# Altium PCB intelGalileoIdcAdapter.PcbDoc
Units mil, origin at the board's own origin, x right, y up, seen from the top; angles counter-clockwise.
Board outline 2737.5 x 2834 mil, 2 copper layers (Top Layer, Bottom Layer), stack 65.792 mil thick; 26 components, 44 nets, 119 pads, 0 vias.
Unrouted connection lines stored in the file: 1.
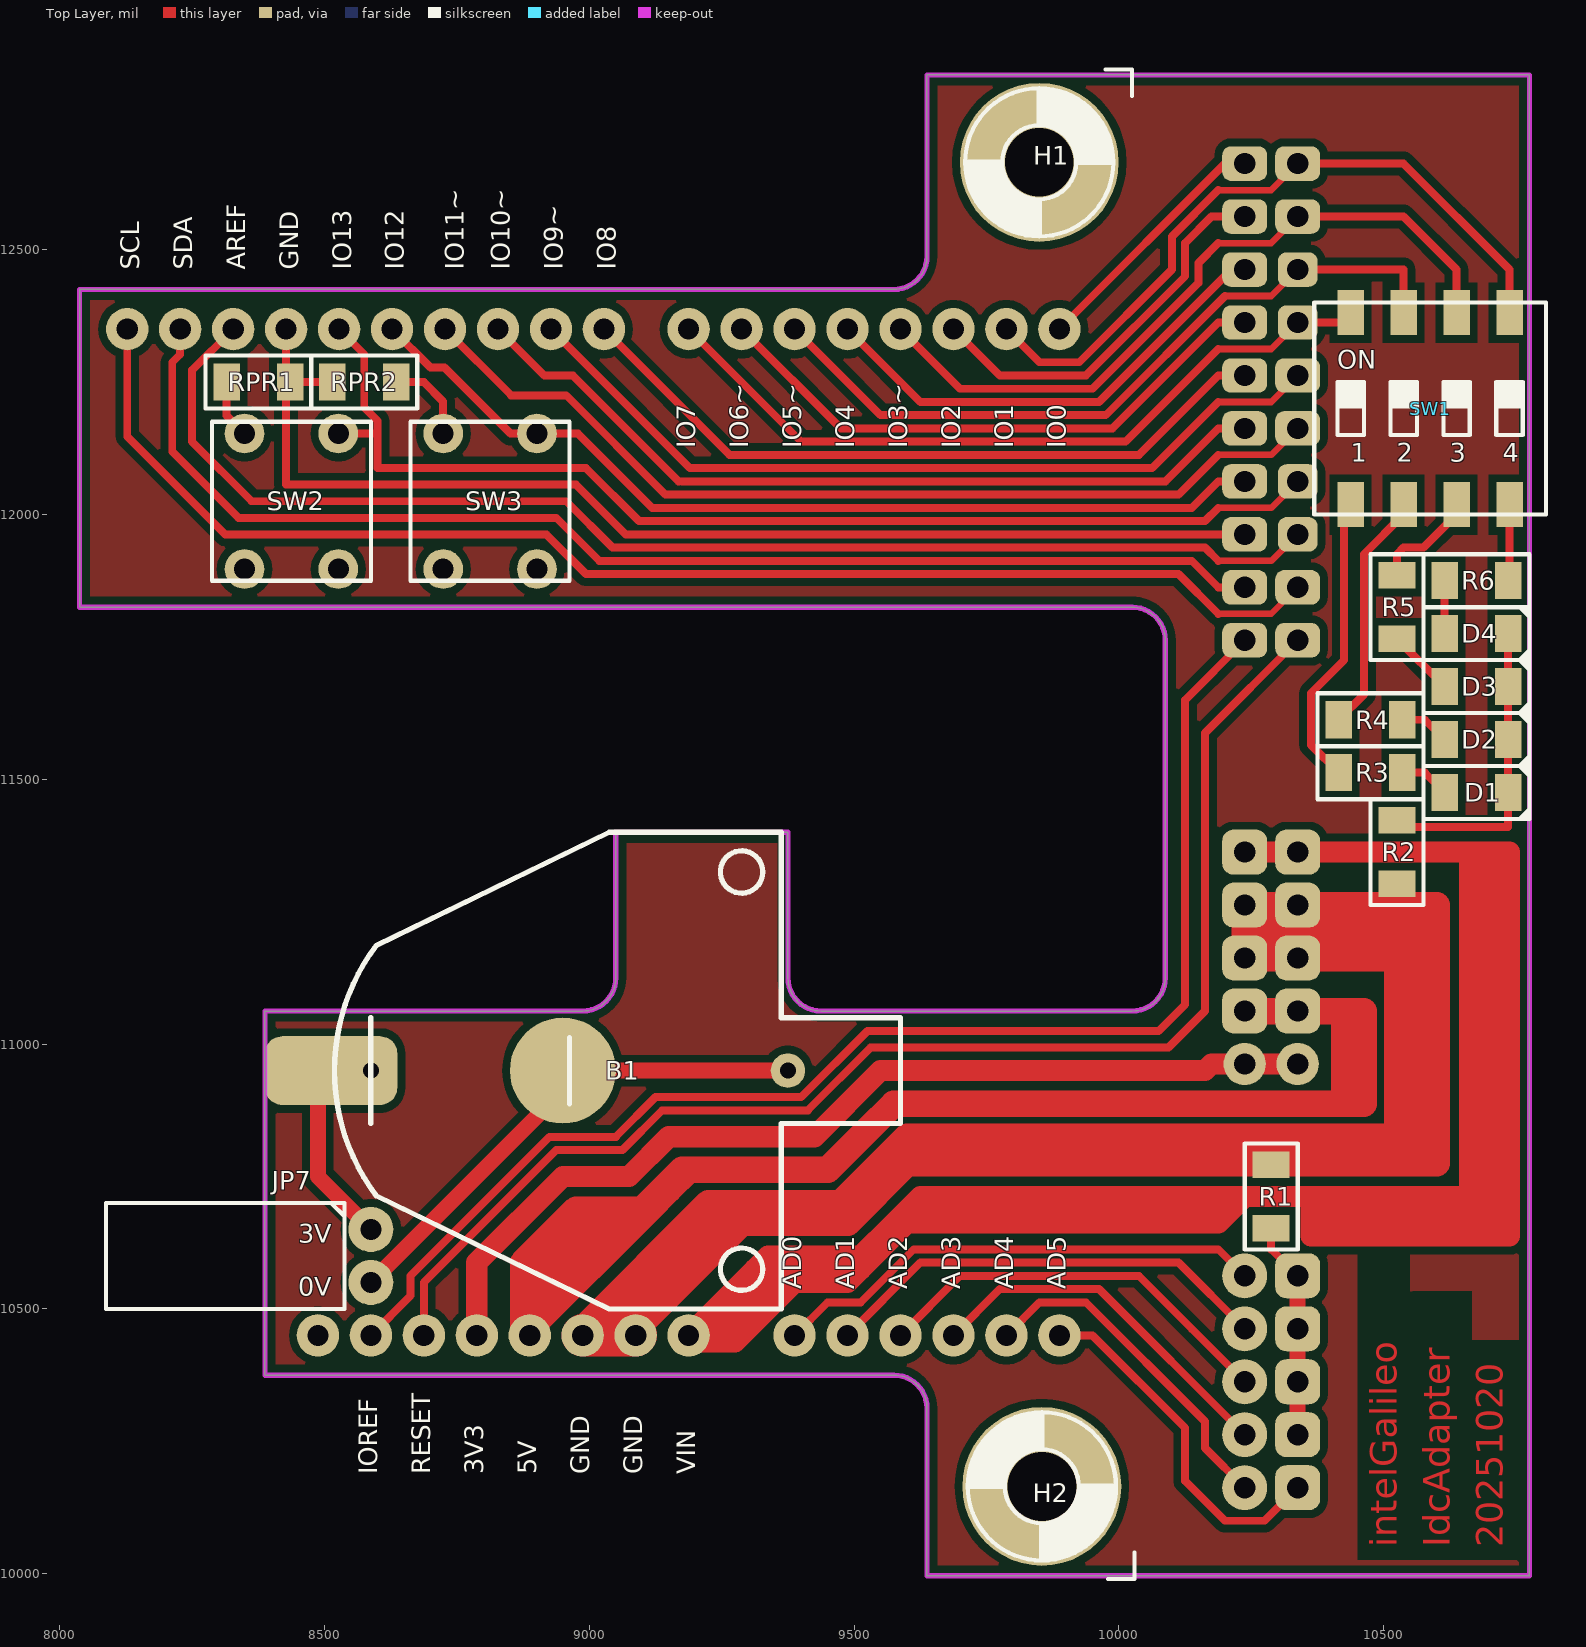
[diagram p0: Top Layer view]
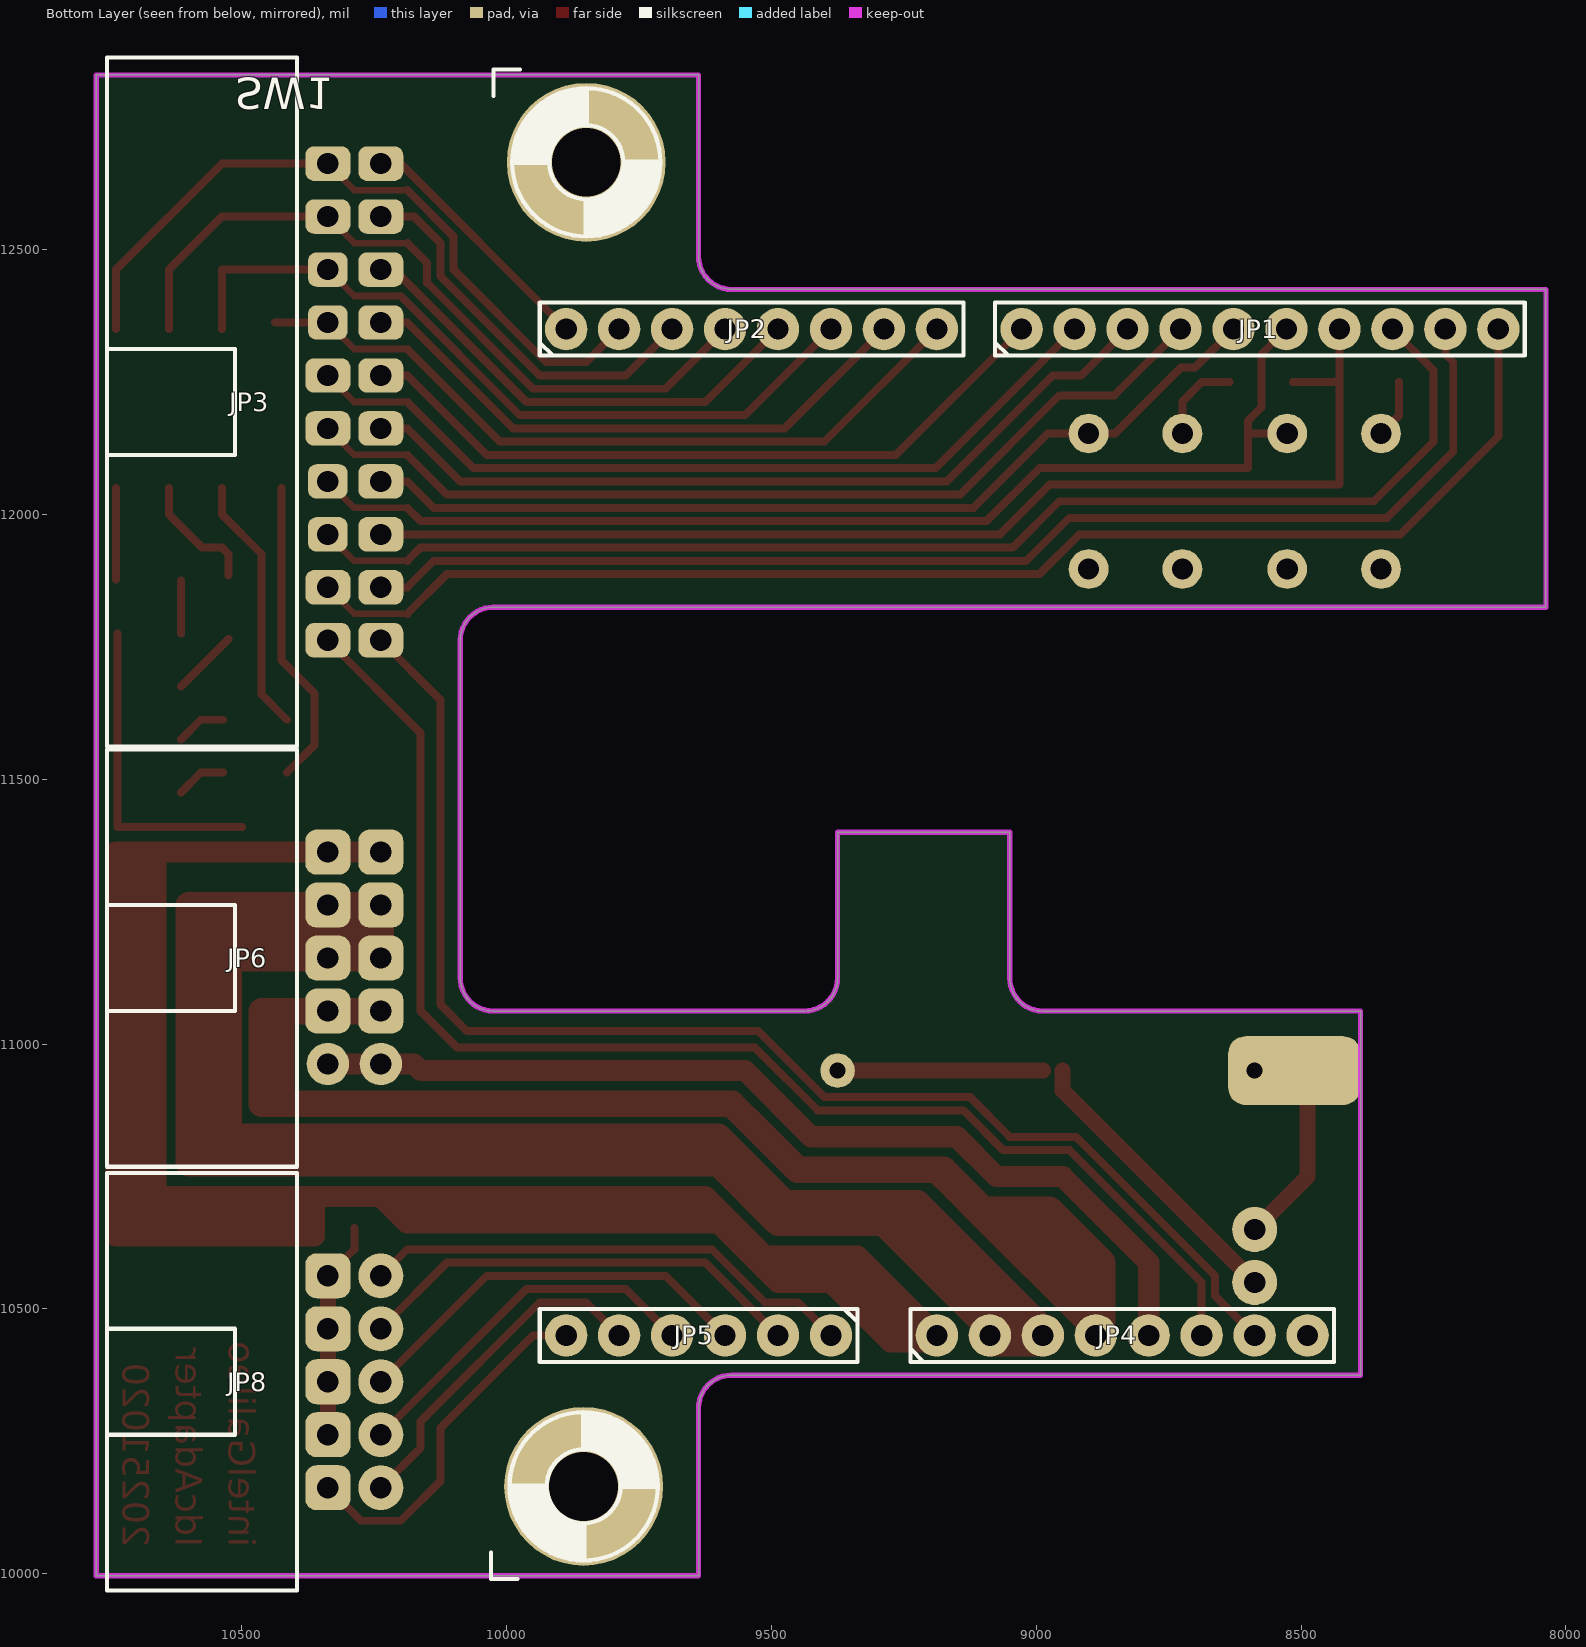
[diagram p1: Bottom Layer view, seen from below]
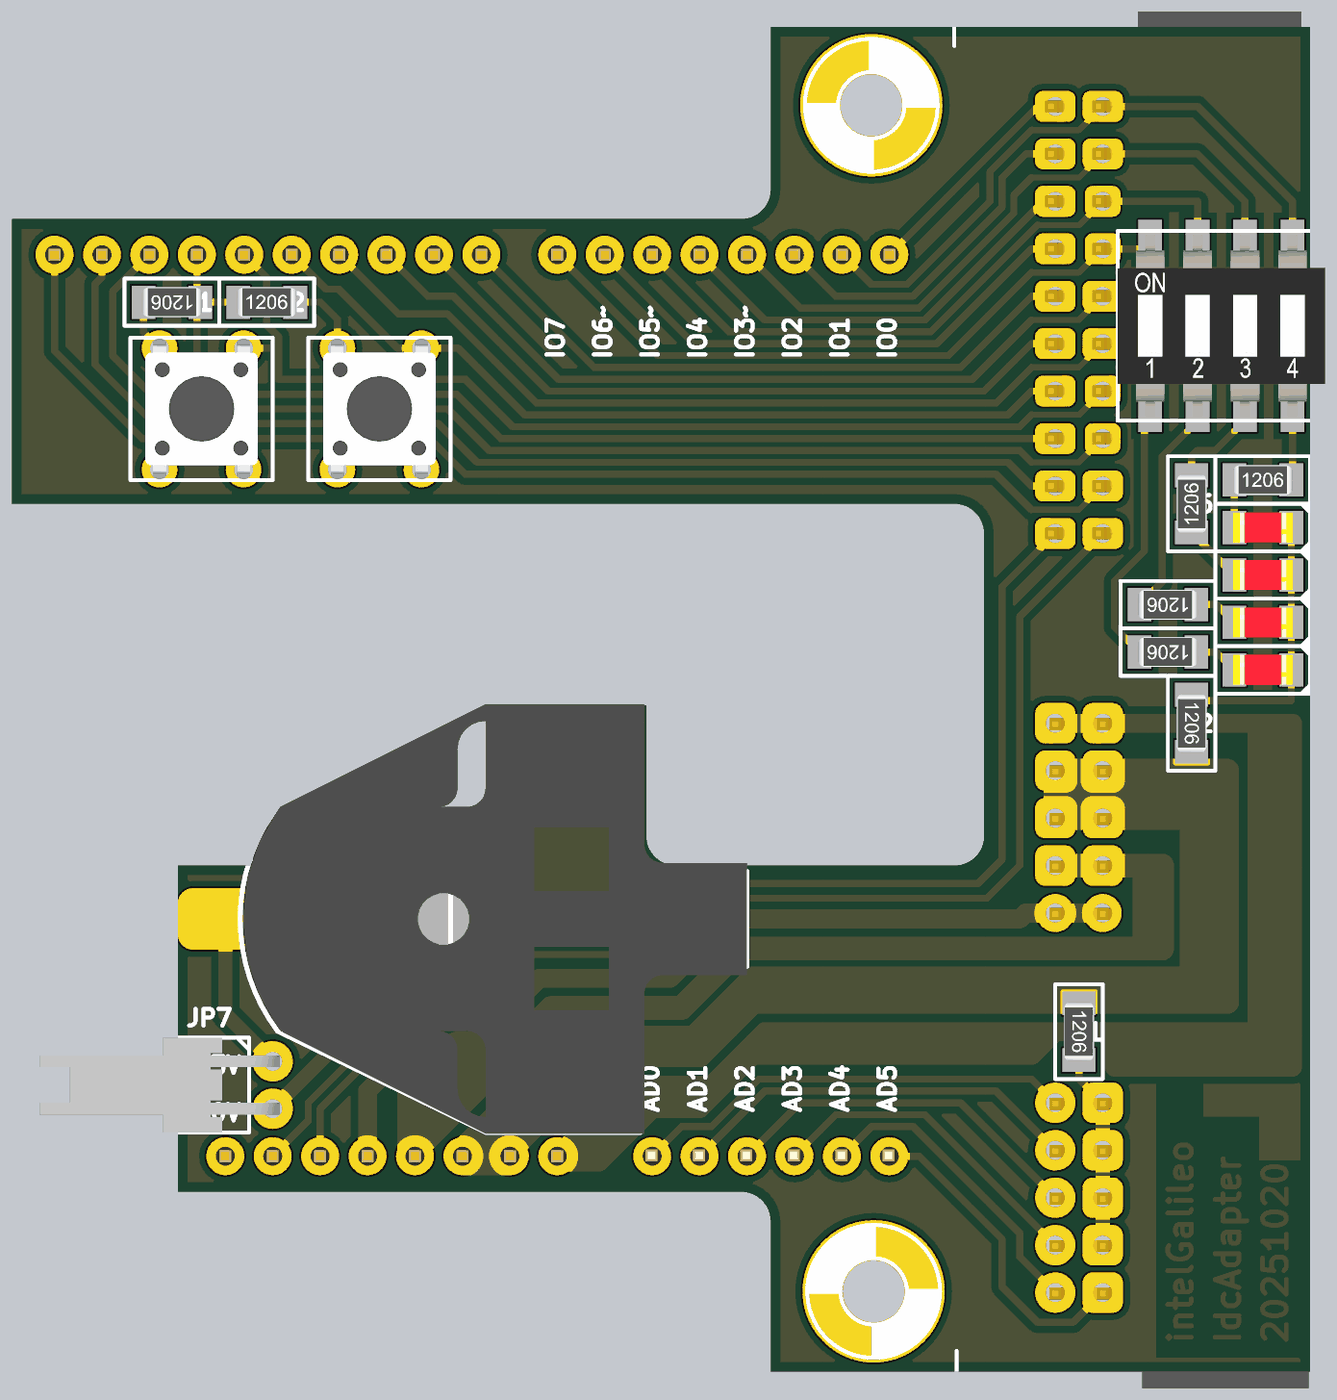
[diagram p2: 3D render of the assembled board from above, using the file's embedded part models]
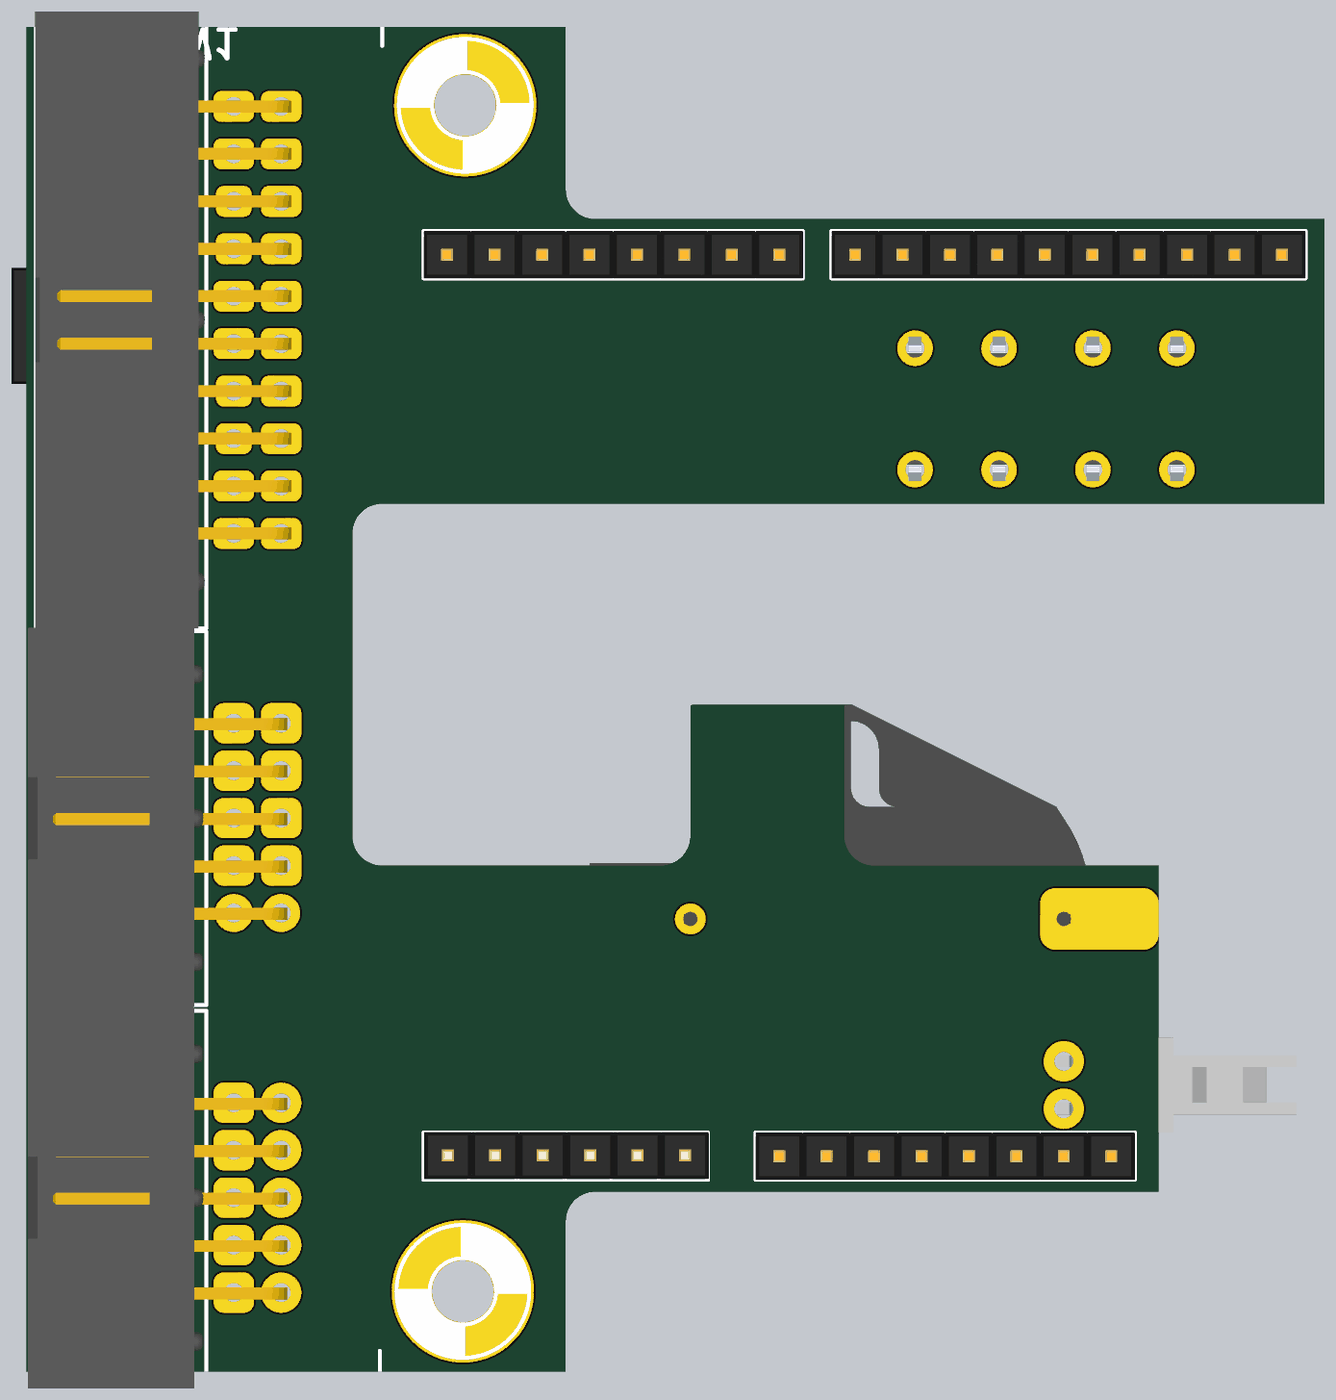
[diagram p3: 3D render of the assembled board from below, using the file's embedded part models]

## Layer stack, top to bottom
Top Layer: signal copper 1.4
Dielectric: core 62.9921, FR-4, Dk 4.8
Bottom Layer: signal copper 1.4

## Board outline
8387.5,10375 8387.5,11062.5 8987.5,11062.5 ccw(c8987.5,11125) 9050,11125 9050,11400 9375,11400 9375,11125 ccw(c9437.5,11125) 9437.5,11062.5 10025,11062.5 ccw(c10025,11125) 10087.5,11125 10087.5,11762.5 ccw(c10025,11762.5) 10025,11825 8037.5,11825 8037.5,12425 9575,12425 ccw(c9575,12487.5) 9637.5,12487.5 9637.5,12830 10775,12830 10775,9996 9637.5,9996 9637.5,10312.5 ccw(c9575,10312.5) 9575,10375

## Design rules (kind name [scope] priority, off if disabled: settings)
Clearance [All] p1: gap=15
PolygonConnect [All] p1: connectstyle=Relief reliefconductorwidth=10 reliefentries=4 polygonreliefangle="90 Angle"
RoutingVias [All] p1: holewidth=28 width=50 viastyle="Through Hole" minholewidth=28 minwidth=50 maxholewidth=28 maxwidth=50
SilkscreenOverComponentPads [All] p1: minsilkscreentomaskgap=10
SolderMaskExpansion [All] p1: expansion=4
Width [All] p1: maxlimit=200 minlimit=10 preferedwidth=20
27 further rules are at their usual default settings.

## Components (designator, comment, footprint, x,y, rotation, side; value= is the part's Value field where it differs from the comment)
B1 "CR2032 Socket" BAT_PP_2032_X1_HORIZ 8587.5,10950 r0 top
D1 "LED" LED_1206 10675,11475 r0 top
D2 "LED" LED_1206 10675,11575 r0 top
D3 "LED" LED_1206 10675,11675 r0 top
D4 "LED" LED_1206 10675,11775 r0 top
H1 "Agujero de Montaje" agujero 9849.5,12665 r0 top
H2 "Agujero de Montaje" agujero 9854.5,10165 r270 top
JP1 "Header10x1" HDR10x1 9027.5,12350 r180 bottom
JP2 "Header8x1" HDR8X1 9887.5,12350 r180 bottom
JP3 "IDC 10x2 90deg" IDC10x2_90 10237.5,11862.5 r90 bottom
JP4 "Header8x1" HDR8X1 9187.5,10450 r180 bottom
JP5 "Header6x1" HDR6x1 9387.5,10450 r0 bottom
JP6 "IDC 5x2" IDC5x2_90#1 10287.5,11162.5 r90 bottom
JP7 "Header2x1" CONPOL2x1_90 8587.5,10650 r270 top
JP8 "IDC 5x2" IDC5x2_90#2 10287.5,10362.5 r90 bottom
R1 "Resistencia 1206; 0ohm" R1206 10287.5,10712.5 r270 top
R2 "Resistencia 1206; 0ohm" R1206 10525,11362.5 r270 top
R3 "Res" R1206 10475,11512.5 r180 top
R4 "Res" R1206 10475,11612.5 r180 top
R5 "Res" R1206 10525,11825 r90 top (schematic designator R3)
R6 "Res" R1206 10675,11875 r0 top
RPR1 "Res" R1206 8375,12250 r180 top
RPR2 "Res" R1206 8575,12250 r0 top
SW1 "SWDIP4" SW_DIP_04_SMD 10587.5,12200 r90 top
SW2 "SW_T_5MM" SW_T_5MM 8437.5,12025 r90 top
SW3 "SW_T_5MM" SW_T_5MM 8812.5,12025 r90 top

## Footprints (in the part's own frame and the unit in brackets; to place one, negate y for a bottom-side part, rotate by r counter-clockwise, add the part's x,y. Pads: shape width x height; smd on the part's side, far side on the other; paste and mask are expansions set on the pad)
agujero [mil] "AGUJERO DE MONTAJE"
  round 300 hole 130: 1(0,0)
  silkscreen extent -140,-140 175,175
BAT_PP_2032_X1_HORIZ [mil]
  round 200 smd: 0(362.5,0)
  rrect50% 250x130 hole 30 copper offset -75,0: 1(0,0)
  round 65 hole 30: 2(787.4,0)
  silkscreen extent -69,-450 1000,450, body extent -63,-453 1000,453, height 257
CONPOL2x1_90 [mil]
  round 85 hole 40: 1(0,0) 2(100,0)
  silkscreen extent -50,-500 150,-50, body extent -50,-491 150,14, height 250
HDR6x1 [mil] "HEADER 6x1"
  round 80 hole 40: 1(0,0) 2(100,0) 3(200,0) 4(300,0) 5(400,0) 6(500,0)
  silkscreen extent -50,-50 550,50, body extent -51,-51 549,49, height 336
HDR8X1 [mil]
  round 80 hole 40: 1(0,0) 2(100,0) 3(200,0) 4(300,0) 5(400,0) 6(500,0) 7(600,0) 8(700,0)
  silkscreen extent -50,-50 750,50, body extent -50,-50 750,50, height 337
HDR10x1 [mil]
  round 80 hole 40: 1(0,0) 2(100,0) 3(200,0) 4(300,0) 5(400,0) 6(500,0) 7(600,0) 8(700,0) 9(800,0) 10(900,0)
  silkscreen extent -50,-50 950,50, body extent -50,-50 950,50, height 337
IDC5x2_90#1 [mil]
  round 80 hole 40: 1(-200,-50) 2(-200,50)
  rrect50% 85x85 hole 40: 3(-100,-50) 4(-100,50) 5(0,-50) 6(0,50) 7(100,-50) 8(100,50) 9(200,-50) 10(200,50)
  silkscreen extent -394,108 394,467, body extent -402,-63 402,484, height 368
IDC5x2_90#2 [mil]
  round 85 hole 40: 1(-200,-50) 3(-100,-50) 5(0,-50) 7(100,-50) 9(200,-50)
  rrect50% 85x85 hole 40: 2(-200,50) 4(-100,50) 6(0,50) 8(100,50) 10(200,50)
  silkscreen extent -394,108 394,467, body extent -402,-63 402,484, height 368
IDC10x2_90 [mil]
  rrect50% 65x85 hole 40: 1(-100,0) 2(-100,100) 3(0,0) 4(0,100) 5(100,0) 7(200,0) 9(300,0) 10(300,100) 11(400,0) 12(400,100) 13(500,0) 15(600,0) 17(700,0) 18(700,100) 19(800,0) 20(800,100)
  rrect50% 65x75 hole 40: 6(100,100) 8(200,100) 14(500,100) 16(600,100)
  silkscreen extent -300,158 1000,517, body extent -300,-22 1000,519, height 359
LED_1206 [mil]
  rect 50x70 smd: 1(-60,0) 2(60,0)
  silkscreen extent -100,-50 100,50, body extent -62,-31 64,32, height 44
R1206 [mil]
  rect 50x70 smd: 1(-60,0) 2(60,0)
  silkscreen extent -100,-50 100,50, body extent -63,-31 63,31, height 34
SW_DIP_04_SMD [mil]
  rect 85x50 smd: 1(-181.25,150) 2(-181.25,50) 3(-181.25,-50) 4(-181.25,-150) 5(181.25,-150) 6(181.25,-50) 7(181.25,50) 8(181.25,150)
  silkscreen extent -200,-219 200,219, body extent -193,-219 193,219, height 177
SW_T_5MM [mm] "PULSADOR DE 2 CONTACTOS, 4 TERMINALES"
  round 1.905 hole 1.016: 1(3.25,-2.25) 2(3.25,2.25) 3(-3.25,-2.25) 4(-3.25,2.25)
  silkscreen extent -3.81,-3.81 3.81,3.81, body extent -3.87,-3.01 3.87,3.02, height 5.01

## Part data
D1 D2 D3 D4: "Led"
JP1: "Header 10x1"
JP2 JP4: "Header 8x1"
JP5: "Header 6x1"
JP7: "Header 2x1"
R3 R4 R5 R6 RPR1 RPR2: "Resistencia"
SW1: "Dip switch 4 contactos"
SW2 SW3: library part SW_T_5MM_1

## Nets (pads, with @x,y where several pads share a name; then routed paths per layer and width w, separated by ;. In a path a pad name is that pad's centre, name@x,y a point inside that pad or via, vN(x,y) a via of type N, cw(c..) or ccw(c..) an arc to the next point about the centre after c; other vN are vias at no path point)
3V3: JP4.5 JP6.1 JP6.2 | length 1855.3
  Top Layer w40: JP4.5 8787.5,10587.5 8950,10750 9075,10750 9150,10825 9425,10825 9550,10950 10162.5,10950 10175,10962.5 JP6.1 JP6.2 JP6.2@10337.5,10950
5V: JP4.4 JP6.3 JP6.4 | length 3307.3
  Top Layer w50: JP4.4@8875,10450 8875,10587.5 8975,10687.5 9112.5,10687.5 ; JP4.4@8887.5,10462.5 9112.5,10687.5 ; 8887.5,10525 9050,10687.5 ; 8912.5,10587.5 9000,10675 ; 9087.5,10675 9175,10762.5 9187.5,10762.5 ; JP6.3 10462.5,11062.5 ; 9112.5,10687.5 9150,10725 9187.5,10762.5 ; 9187.5,10762.5 9450,10762.5 9525,10837.5 9575,10887.5 10150,10887.5 10462.5,10887.5 ; 10462.5,10887.5 10425,10887.5 10425,11062.5 10462.5,11062.5 ; 10462.5,10887.5 10462.5,11062.5
2032_3V: B1.1 JP7.1 | length 416.4
  Top Layer w30: B1.1@8462.5,10950 B1.1@8537.5,10950 ; B1.1@8487.5,10950 8487.5,10750 JP7.1
2032_GND: B1.2 JP7.2 | length 937.6
  Top Layer w30: JP7.2 8950,10912.5 8950,10950 ; 8987.5,10950 B1.2
AD0: JP5.1 JP8.9 | length 938
  Top Layer w15: JP5.1 9450,10512.5 9512.5,10512.5 9612.5,10612.5 10187.5,10612.5 JP8.9
AD1: JP5.2 JP8.7 | length 858.7
  Top Layer w15: JP5.2 9625,10587.5 10112.5,10587.5 JP8.7
AD2: JP5.3 JP8.5 | length 779.4
  Top Layer w15: JP5.3 9700,10562.5 9950,10562.5 10037.5,10562.5 10137.5,10462.5 JP8.5
AD3: JP5.4 JP8.3 | length 700.2
  Top Layer w15: JP5.4 9775,10537.5 9962.5,10537.5 JP8.3
AD4: JP5.5 JP8.1 | length 650.2
  Top Layer w15: JP5.5 9850,10512.5 9937.5,10512.5 10162.5,10287.5 10162.5,10237.5 JP8.1
AD5: JP5.6 JP8.2 | length 679.4
  Top Layer w15: JP5.6 9950,10450 10125,10275 10125,10175 10200,10100 10275,10100 JP8.2
AREF: JP1.8 JP3.6 | length 2446
  Top Layer w12.5: 10187.5,11912.5 10287.5,11912.5 JP3.6
  Top Layer w15: JP1.8 8250,12272.5 8250,12137.5 8362.5,12025 8956.25,12025 9043.75,11937.5 10162.5,11937.5 10187.5,11912.5
GND: JP4.2 JP4.3 JP6.5 JP6.6 JP6.7 JP6.8 R1.1 R2.2 | length 5863.3
  Top Layer w50: JP4.3@8987.5,10462.5 9225,10700 9500,10700 ; JP4.2@9075,10450 9287.5,10662.5 ; 9075,10500 9237.5,10662.5 9487.5,10662.5 9600,10775 ; 9437.5,10662.5 9600,10825 10187.5,10825 ; 9575,10775 10600,10775 10600,11262.5 JP6.7 ; 10137.5,10775 10187.5,10825 ; JP6.5 10525,11162.5 10525,10825 10187.5,10825 ; 10562.5,10775 10562.5,11262.5
  Top Layer w80: JP4.3 JP4.2
GND_IO: JP1.7 JP3.5 RPR1.1 RPR2.1 | length 2222.6
  Top Layer w15: JP1.7 8427.5,12056.25 8975,12056.25 9068.75,11962.5 JP3.5 ; RPR1.1 RPR2.1
IO0: JP2.1 JP3.19 | length 459.6
  Top Layer w15: JP2.1 JP3.19@10212.5,12675
IO1: JP2.2 JP3.20 SW1.5 | length 1338.2
  Top Layer w12.5: 10187.5,12612.5 10287.5,12612.5 JP3.20
  Top Layer w15: JP2.2 9850,12287.5 9925,12287.5 10100,12462.5 10100,12525 10187.5,12612.5 ; JP3.20@10362.5,12662.5 10537.5,12662.5 10737.5,12462.5 SW1.5@10737.5,12350
IO2: JP2.3 JP3.17 | length 747.1
  Top Layer w15: JP2.3 9775,12262.5 9937.5,12262.5 10125,12450 10125,12512.5 10175,12562.5 JP3.17
IO3~: JP2.4 JP3.18 SW1.6 | length 1382.1
  Top Layer w12.5: 10187.5,12512.5 10287.5,12512.5 JP3.18
  Top Layer w15: JP2.4 9700,12237.5 9950,12237.5 10150,12437.5 10150,12475 10187.5,12512.5 ; JP3.18@10362.5,12562.5 10537.5,12562.5 10637.5,12462.5 SW1.6@10637.5,12350
IO4: JP2.5 JP3.15 | length 910.5
  Top Layer w15: JP2.5 9625,12212.5 9962.5,12212.5 10212.5,12462.5 JP3.15
IO5~: JP2.6 JP3.16 SW1.7 | length 1418.7
  Top Layer w12.5: 10200,12412.5 10287.5,12412.5 JP3.16
  Top Layer w15: JP2.6 9550,12187.5 9975,12187.5 10200,12412.5 ; JP3.16@10362.5,12462.5 10537.5,12462.5 SW1.7@10537.5,12350
IO6~: JP2.7 JP3.13 | length 1110.5
  Top Layer w15: JP2.7 9475,12162.5 9987.5,12162.5 10187.5,12362.5 JP3.13
IO7: JP2.8 JP3.14 SW1.8 | length 1406.2
  Top Layer w12.5: 10187.5,12312.5 10287.5,12312.5 JP3.14
  Top Layer w15: JP2.8 9400,12137.5 10012.5,12137.5 10187.5,12312.5 ; JP3.14@10362.5,12362.5 SW1.8@10437.5,12362.5
IO8: JP1.1 JP3.11 | length 1370.5
  Top Layer w15: JP1.1 9265,12112.5 10037.5,12112.5 10187.5,12262.5 JP3.11
IO9~: JP1.2 JP3.12 | length 1591.2
  Top Layer w12.5: 10187.5,12212.5 10287.5,12212.5 JP3.12
  Top Layer w15: JP1.2 9190,12087.5 10062.5,12087.5 10187.5,12212.5
IO10~: JP1.3 JP3.9 | length 1564.3
  Top Layer w15: JP1.3 8915,12262.5 8968.75,12262.5 9168.75,12062.5 ; 9175,12062.5 10087.5,12062.5 10187.5,12162.5 JP3.9
IO11~: JP1.4 JP3.10 | length 1791.2
  Top Layer w12.5: 10187.5,12112.5 10287.5,12112.5 JP3.10
  Top Layer w15: JP1.4 8852.5,12225 8956.25,12225 9143.75,12037.5 10112.5,12037.5 10187.5,12112.5
IO12: JP1.5 JP3.7 SW3.1 | length 1770.5
  Top Layer w15: JP1.5 8700,12277.5 8726.54,12277.5 8851.08,12152.95 8978.3,12152.95 9118.75,12012.5 10137.5,12012.5 10187.5,12062.5 JP3.7
IO13: JP1.6 JP3.8 SW2.1 | length 2173.5
  Top Layer w12.5: 10187.5,12012.5 10287.5,12012.5 JP3.8
  Top Layer w15: SW2.1 8597.05,12152.95 ; JP1.6 8575,12302.5 8575,12201.87 8600,12176.87 8600,12087.5 8993.75,12087.5 9093.75,11987.5 10162.5,11987.5 10187.5,12012.5
IOREF: JP3.1 JP4.7 | length 2552.4
  Top Layer w15: JP4.7 8662.5,10525 8662.5,10562.5 8925,10825 9050,10825 9125,10900 9400,10900 9525,11025 10075,11025 10125,11075 10125,11650 JP3.1
NetD1_1: D1.1 R3.1 | length 95.5
  Top Layer w15: R3.1 10577.5,11512.5 D1.1
NetD1_2: D1.2 D2.2 D3.2 D4.2 R2.1 | length 600
  Top Layer w15: R2.1@10500,11410 10735,11410 10735,11425 D4.2
NetD2_1: D2.1 R4.1 | length 95.5
  Top Layer w15: R4.1 10577.5,11612.5 D2.1
NetD3_1: D3.1 R5.1 | length 127.3
  Top Layer w15: R5.1 D3.1
NetD4_1: D4.1 R6.1 | length 100
  Top Layer w15: D4.1 R6.1
NetJP8_4: JP8.4 JP8.6 JP8.8 JP8.10 R1.2 | length 710.7
  Top Layer w15: R1.2 10287.5,10612.5 JP8.10 JP8.4
  Top Layer w30: JP8.4 JP8.10
NetR3_2: R3.2 SW1.1 | length 585.1
  Top Layer w15: R3.2 10362.5,11565 10362.5,11662.5 10425,11725 10425,11825 SW1.1@10425,12050
NetR4_2: R4.2 SW1.2 | length 488.2
  Top Layer w15: R4.2 10462.5,11660 10462.5,11825 10462.5,11925 10537.5,12000 SW1.2@10537.5,12050
NetR5_2: R5.2 SW1.3 | length 233.6
  Top Layer w15: R5.2 10525,11925 10537.5,11937.5 10575,11937.5 10637.5,12000 SW1.3@10637.5,12050
NetR6_2: R6.2 SW1.4 | length 172.5
  Top Layer w15: R6.2@10737.5,11877.5 SW1.4@10737.5,12050
NetRPR1_2: RPR1.2 SW2.2 | length 111.1
  Top Layer w15: RPR1.2 8315,12186.87 SW2.2
NetRPR2_2: RPR2.2 SW3.2 | length 164.6
  Top Layer w15: RPR2.2 8687.5,12250 8723.92,12213.58 SW3.2
RESET: JP3.2 JP4.6 | length 2559.8
  Top Layer w15: JP4.6 8687.5,10550 8937.5,10800 9062.5,10800 9137.5,10875 9412.5,10875 9531.25,10993.75 10093.75,10993.75 10162.5,11062.5 10162.5,11587.5 JP3.2
SCL: JP1.10 JP3.4 | length 2572
  Top Layer w12.5: 10187.5,11812.5 10287.5,11812.5 JP3.4
  Top Layer w15: JP1.10 8127.5,12147.5 8312.5,11962.5 8918.75,11962.5 8993.75,11887.5 10112.5,11887.5 10187.5,11812.5
SDA: JP1.9 JP3.3 | length 2368.6
  Top Layer w15: JP1.9 8227.5,12302.5 8212.5,12287.5 8212.5,12118.75 8337.5,11993.75 8937.5,11993.75 9018.75,11912.5 10137.5,11912.5 10187.5,11862.5 JP3.3
VIN: JP4.1 JP6.9 JP6.10 | length 8325.8
  Top Layer w40: JP4.1@9175,10437.5 9275,10437.5 9437.5,10600 ; JP4.1 9337.5,10600 ; 9237.5,10450 9387.5,10600 ; 9312.5,10575 9512.5,10575 ; 9462.5,10550 9625,10712.5 ; 9537.5,10600 9337.5,10600 ; 9625,10687.5 10212.5,10687.5 ; JP6.9 10737.5,11362.5 10737.5,10712.5 ; 10362.5,10675 10725,10675 ; 10362.5,10712.5 10362.5,10637.5 10737.5,10637.5 10737.5,10712.5 ; 10662.5,11362.5 10662.5,10712.5 ; 10687.5,10712.5 10687.5,11362.5 ; 10712.5,10712.5 10712.5,11362.5 ; 9337.5,10600 9287.5,10550 9487.5,10550 9650,10712.5 ; 9625,10712.5 10237.5,10712.5 ; 9625,10712.5 9650,10712.5 ; 9650,10712.5 9600,10662.5 10187.5,10662.5 10237.5,10712.5 ; 10237.5,10712.5 10662.5,10712.5 ; 10662.5,10712.5 10737.5,10712.5
pads on no net: B1.0 H1.1 H2.1 JP4.8 SW2.3 SW2.4 SW3.3 SW3.4

## Polygon pours and split planes (outlines as drawn)
no net on Top Layer "Bottom Layer-No Net" (solid, pour order 2): 10775,9996 10775,12830 9637.5,12830 9637.5,12487.5 cw(c9575,12487.5) 9575,12425 8037.5,12425 8037.5,11825 10025,11825 cw(c10025,11762.5) 10087.5,11762.5 10087.5,11125 cw(c10025,11125) 10025,11062.5 9437.5,11062.5 cw(c9437.5,11125) 9375,11125 9375,11400 9050,11400 9050,11125 cw(c8987.5,11125) 8987.5,11062.5 8387.5,11062.5 8387.5,10375 9575,10375 cw(c9575,10312.5) 9637.5,10312.5 9637.5,9996

## Keep-outs
Keep-Out Layer:
  lines w10: 8037.5,11825 10025,11825 cw(c10025,11762.5) 10087.5,11762.5 10087.5,11125 cw(c10025,11125) 10025,11062.5 9437.5,11062.5 cw(c9437.5,11125) 9375,11125 9375,11400 9050,11400 9050,11125 cw(c8987.5,11125) 8987.5,11062.5 8387.5,11062.5 8387.5,10375 9575,10375 cw(c9575,10312.5) 9637.5,10312.5 9637.5,9996 10050,9996 10775,9996 10775,12830 10019.5,12830 9637.5,12830 9637.5,12487.5 cw(c9575,12487.5) 9575,12425 8037.5,12425 8037.5,11825

## Other copper
Top Layer:
  rectangle net GND: 9037.5,10475 9075,10500
  rectangle net GND: 10175,10775 10550,10837.5
  rectangle net GND: 10212.5,11162.5 10550,11262.5
  text "intelGalileo" at 10525,10050 h50 r90
  text "IdcAdapter" at 10625,10050 h50 r90
  text "20251020" at 10725,10050 h50 r90

## Silkscreen, mask and mechanical layers (free items; w line width, h text height)
Top Overlay:
  text "SCL" at 8150,12462.5 h35 r90
  text "SDA" at 8250,12462.5 h35 r90
  text "AREF" at 8350,12462.5 h35 r90
  text "GND" at 8450,12462.5 h35 r90
  text "IO13" at 8550,12462.5 h35 r90
  text "IO12" at 8650,12462.5 h35 r90
  text "IO11~" at 8762.5,12462.5 h35 r90
  text "IO10~" at 8850,12462.5 h35 r90
  text "IO9~" at 8950,12462.5 h35 r90
  text "IO8" at 9050,12462.5 h35 r90
  text "IO7" at 9200,12125 h35 r90
  text "IO6~" at 9300,12125 h35 r90
  text "IO5~" at 9400,12125 h35 r90
  text "IO4" at 9500,12125 h35 r90
  text "IO3~" at 9600,12125 h35 r90
  text "IO2" at 9700,12125 h35 r90
  text "IO1" at 9800,12125 h35 r90
  text "IO0" at 9900,12125 h35 r90
  text "3V" at 8450,10625 h35
  text "AD0" at 9400,10537.5 h35 r90
  text "AD1" at 9500,10537.5 h35 r90
  text "AD2" at 9600,10537.5 h35 r90
  text "AD3" at 9700,10537.5 h35 r90
  text "AD4" at 9800,10537.5 h35 r90
  text "AD5" at 9900,10537.5 h35 r90
  text "0V" at 8450,10525 h35
  text "IOREF" at 8600,10187.5 h35 r90
  text "RESET" at 8700,10187.5 h35 r90
  text "3V3" at 8800,10187.5 h35 r90
  text "5V" at 8900,10187.5 h35 r90
  text "GND" at 9000,10187.5 h35 r90
  text "GND" at 9100,10187.5 h35 r90
  text "VIN" at 9200,10187.5 h35 r90
mechanical:
  lines w5: 7387.5,10375 9987.5,10375 10037.5,10375 10037.5,10500 10037.5,11850 10037.5,11950 10037.5,12425 9887.5,12425 7387.5,12425 7387.5,10375
  lines w10: 8962.5,11125 9012.5,11125 ; 8987.5,11100 8987.5,11150 ; 9412.5,11125 9462.5,11125 ; 9437.5,11100 9437.5,11150 ; 9550,10312.5 9600,10312.5 ; 9550,12487.5 9600,12487.5 ; 9575,10287.5 9575,10337.5 ; 9575,12462.5 9575,12512.5 ; 10000,11087.5 10050,11087.5 ; 10000,11762.5 10050,11762.5 ; 10025,11062.5 10025,11112.5 ; 10025,11737.5 10025,11787.5 ; 7912.5,10987.5 8500,10987.5 8500,11575 7912.5,11575 7912.5,10987.5 ; 9075,10875 9075,11200 9525,11200 9525,10875 9075,10875 ; 9075,11375 9525,11375 9525,11700 9075,11700 9075,11375 ; 9843.02,11298.04 10043.02,11298.04 10043.02,11598.04 9843.02,11598.04 9843.02,11298.04
etiquetas:
  drawing of 330 lines, arcs and shapes, not listed
  text "IO1" at 11462.5,12650 h35
  text "IO0" at 11675,12650 h35
  text "IO2" at 11462.5,12550 h35
  text "IO3~" at 11675,12550 h35
  text "IO7" at 10450,12487.5 h35 r90
  text "IO5~" at 10550,12487.5 h35 r90
  text "IO3~" at 10650,12487.5 h35 r90
  text "IO1" at 10750,12487.5 h35 r90
  text "IO4" at 11462.5,12450 h35
  text "IO5~" at 11675,12450 h35
  text "IO6~" at 11462.5,12350 h35
  text "IO7" at 11675,12350 h35
  text "IO8" at 11462.5,12250 h35
  text "IO9~" at 11675,12250 h35
  text "IO10~" at 11462.5,12150 h35
  text "IO11~" at 11675,12150 h35
  text "IO12" at 11462.5,12050 h35
  text "IO13" at 11675,12050 h35
  text "GND" at 11462.5,11950 h35
  text "AREF" at 11675,11950 h35
  text "SDA" at 11462.5,11850 h35
  text "SCL" at 11675,11850 h35
  text "IO1" at 10850,11762.5 h35
  text "IOREF" at 11462.5,11750 h35
  text "RESET" at 11675,11750 h35
  text "IO13" at 8375,11712.5 h35
  text "IO12" at 8750,11712.5 h35
  text "IO3~" at 10850,11662.5 h35
  text "IO5~" at 10850,11562.5 h35
  text "IO7" at 10850,11462.5 h35
  text "VIN" at 11462.5,11350 h35
  text "VIN" at 11675,11350 h35
  text "GND" at 11462.5,11250 h35
  text "GND" at 11675,11250 h35
  text "GND" at 11462.5,11150 h35
  text "GND" at 11675,11150 h35
  text "5V" at 11462.5,11050 h35
  text "5V" at 11675,11050 h35
  text "3V3" at 11462.5,10950 h35
  text "3V3" at 11675,10950 h35
  text "AD0" at 11462.5,10550 h35
  text "GND" at 11675,10550 h35
  text "AD1" at 11462.5,10450 h35
  text "GND" at 11675,10450 h35
  text "AD2" at 11462.5,10350 h35
  text "GND" at 11675,10350 h35
  text "AD3" at 11462.5,10250 h35
  text "GND" at 11675,10250 h35
  text "AD4" at 11462.5,10150 h35
  text "AD5" at 11675,10150 h35
  text "WIDTH" at 9887.5,9775 h50
  text "STANDS" at 10187.5,9775 h50
  text "LINE" at 9662.5,9725 h50
  text "[mils]" at 9887.5,9675 h50
  text "[A] @35um" at 10187.5,9675 h50
  text "3V3" at 9687.5,9575 h50
  text "40" at 9962.5,9575 h50
  text ">3A" at 10262.5,9575 h50
  text "PCB GALILEO" at 11987.5,9525 h35 r90
  text "5V" at 9687.5,9475 h50
  text "50" at 9962.5,9475 h50
  text ">3.75A" at 10262.5,9475 h50
  text "PCB ADAPTADOR" at 11400,9437.5 h35 r90
  text "GND" at 9687.5,9375 h50
  text "80" at 9962.5,9375 h50
  text ">6A" at 10262.5,9375 h50
  text "LADO COMPONENTES" at 11300,9337.5 h35 r90
  text "LADO COMPONENTES" at 11887.5,9337.5 h35 r90
  text "VIN" at 9687.5,9275 h50
  text "40" at 9962.5,9275 h50
  text ">3A" at 10262.5,9275 h50
  text "(3V3_VOUT GALILEO A MODULOS)" at 8800,9175 h35 r90
  text "(5V_VOUT GALILEO A MODULOS)" at 8900,9175 h35 r90
  text "(VIN ALTERNATIVA P/GALILEO)" at 9200,9175 h35 r90
  text "SENTIDO DE ORIENTACION:" at 11200,9150 h35 r90
borderPcb:
  lines w10: 8037.5,11825 8037.5,12425 9575,12425 ccw(c9575,12487.5) 9637.5,12487.5 9637.5,12830 10019.5,12830 10775,12830 10775,9996 10050,9996 9637.5,9996 9637.5,10312.5 ccw(c9575,10312.5) 9575,10375 8387.5,10375 8387.5,11062.5 8987.5,11062.5 ccw(c8987.5,11125) 9050,11125 9050,11400 9375,11400 9375,11125 ccw(c9437.5,11125) 9437.5,11062.5 10025,11062.5 ccw(c10025,11125) 10087.5,11125 10087.5,11762.5 ccw(c10025,11762.5) 10025,11825 8037.5,11825
mechanicalAux:
  lines w10: 5882.5,9996 5882.5,12830 10019.5,12830 10019.5,11905 10086.5,11838 10086.5,10549 10019.5,10482 10019.5,9996 5882.5,9996 ; 7262.5,10650 7262.5,10750 7475,10750 7475,10650 7262.5,10650 ; 8437.5,10237.5 8437.5,10337.5 8737.5,10337.5 8737.5,10237.5 8437.5,10237.5 ; 8850,10250 8850,10350 9050,10350 9050,10250 8850,10250 ; 9200,12550 9200,12750 9612.5,12750 9612.5,12550 9200,12550

## Dimensions
10025,11062.5 to 9575,12425 on dimensionAux
9575,12425 to 9637.5,12487.5 on dimensionAux

## Text inside footprints (layer, text, board x,y; h text height)
SW1: Top Overlay "4" at 10725,12100 h35; Top Overlay "3" at 10625,12100 h35; Top Overlay "2" at 10525,12100 h35; Top Overlay "1" at 10437.5,12100 h35; Top Overlay "ON" at 10412.5,12275 h35